# Altium PCB PCB.PcbDoc (part 1 of 2)
Units mm, origin at the board's own origin, x right, y up, seen from the top; angles counter-clockwise.
Board outline 45 x 167.34 mm, 2 copper layers (Top Layer, Bottom Layer); 96 components, 59 nets, 383 pads, 99 vias.
Unrouted connection lines stored in the file: 24.
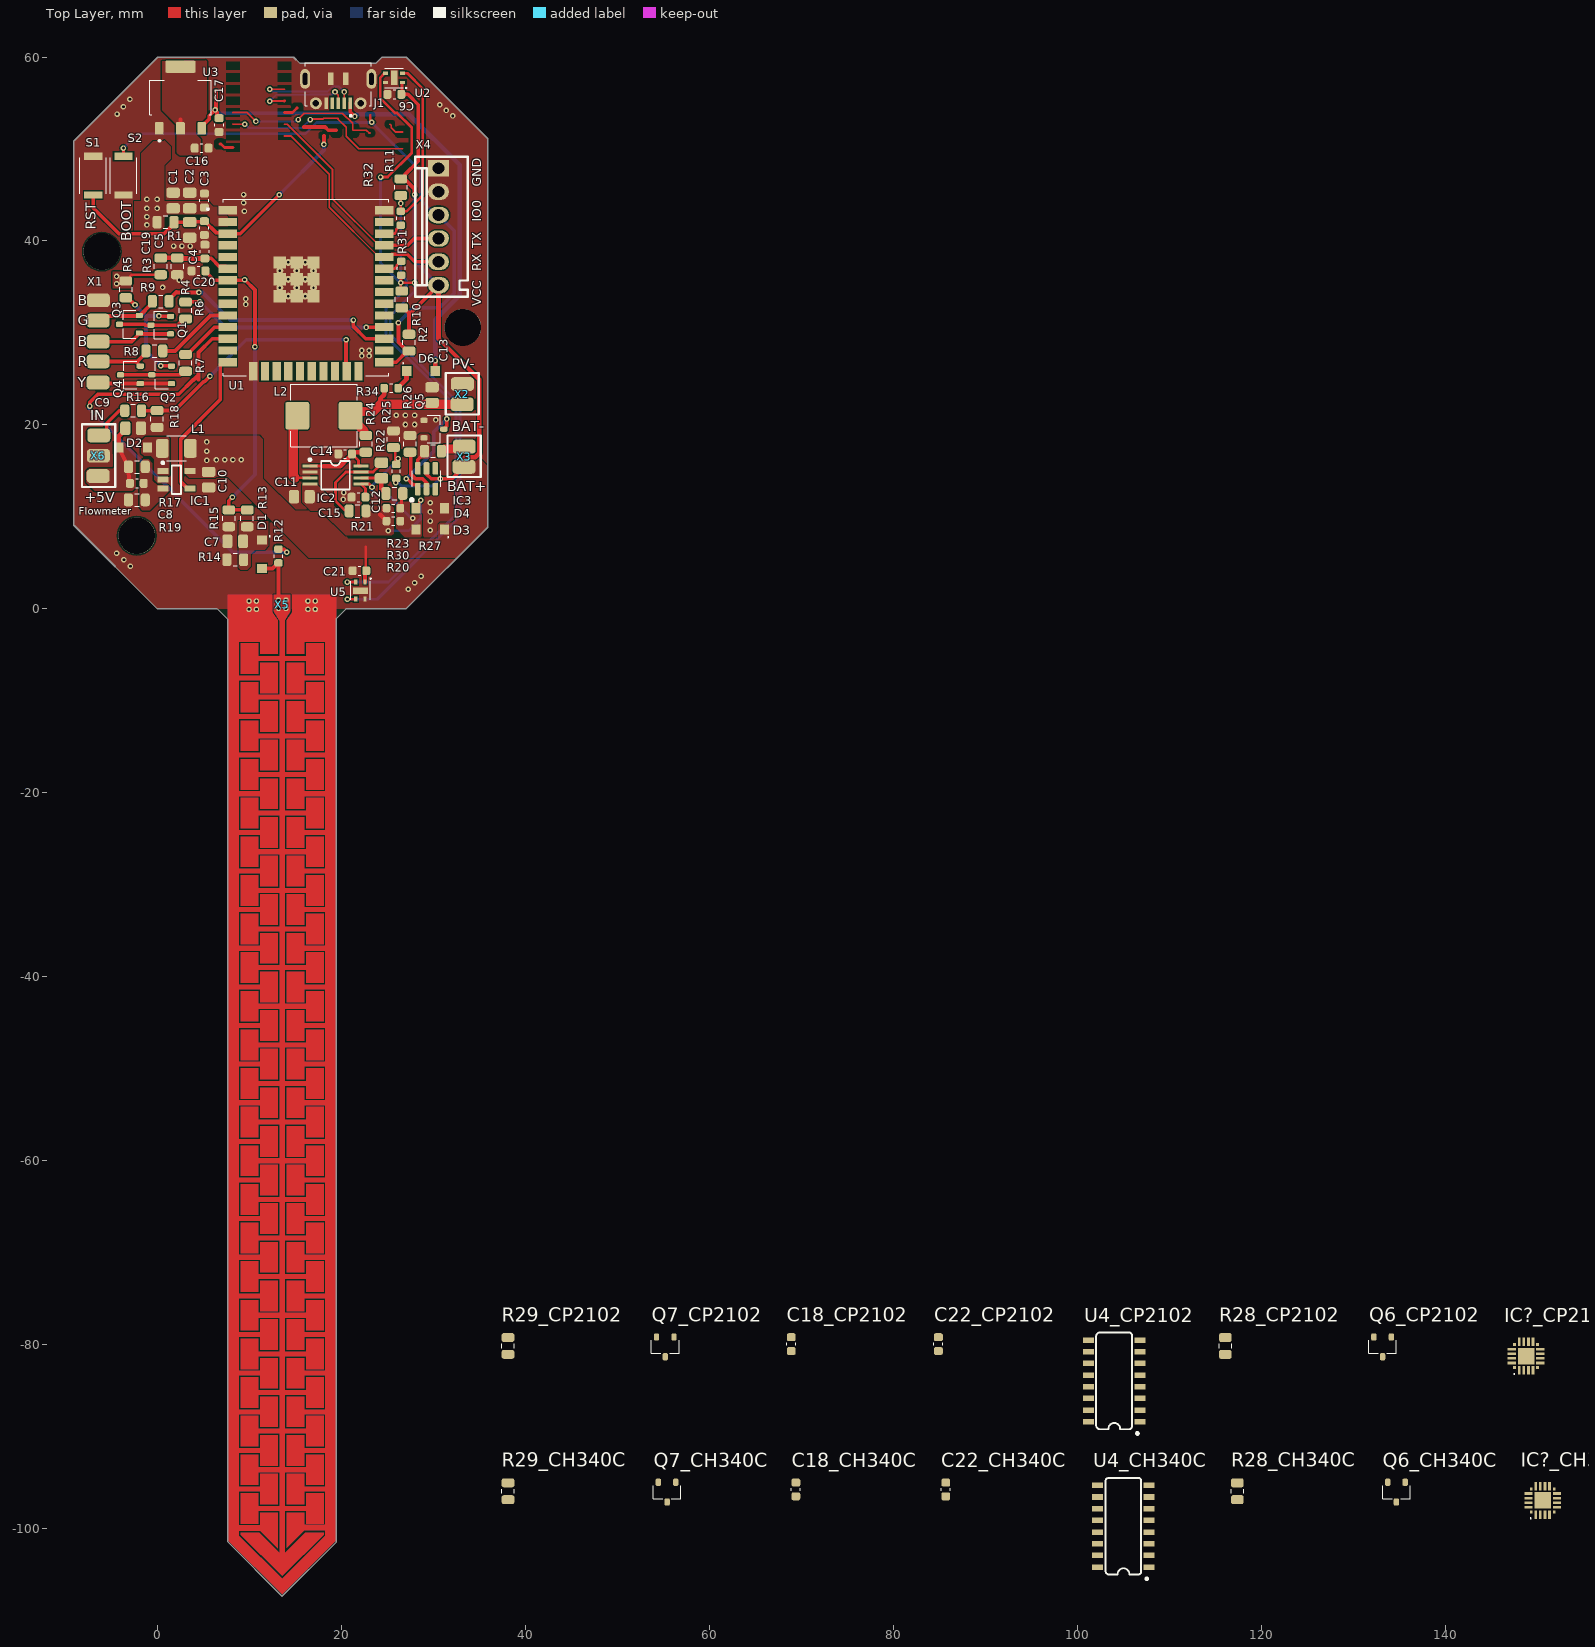
[diagram p0: Top Layer view]
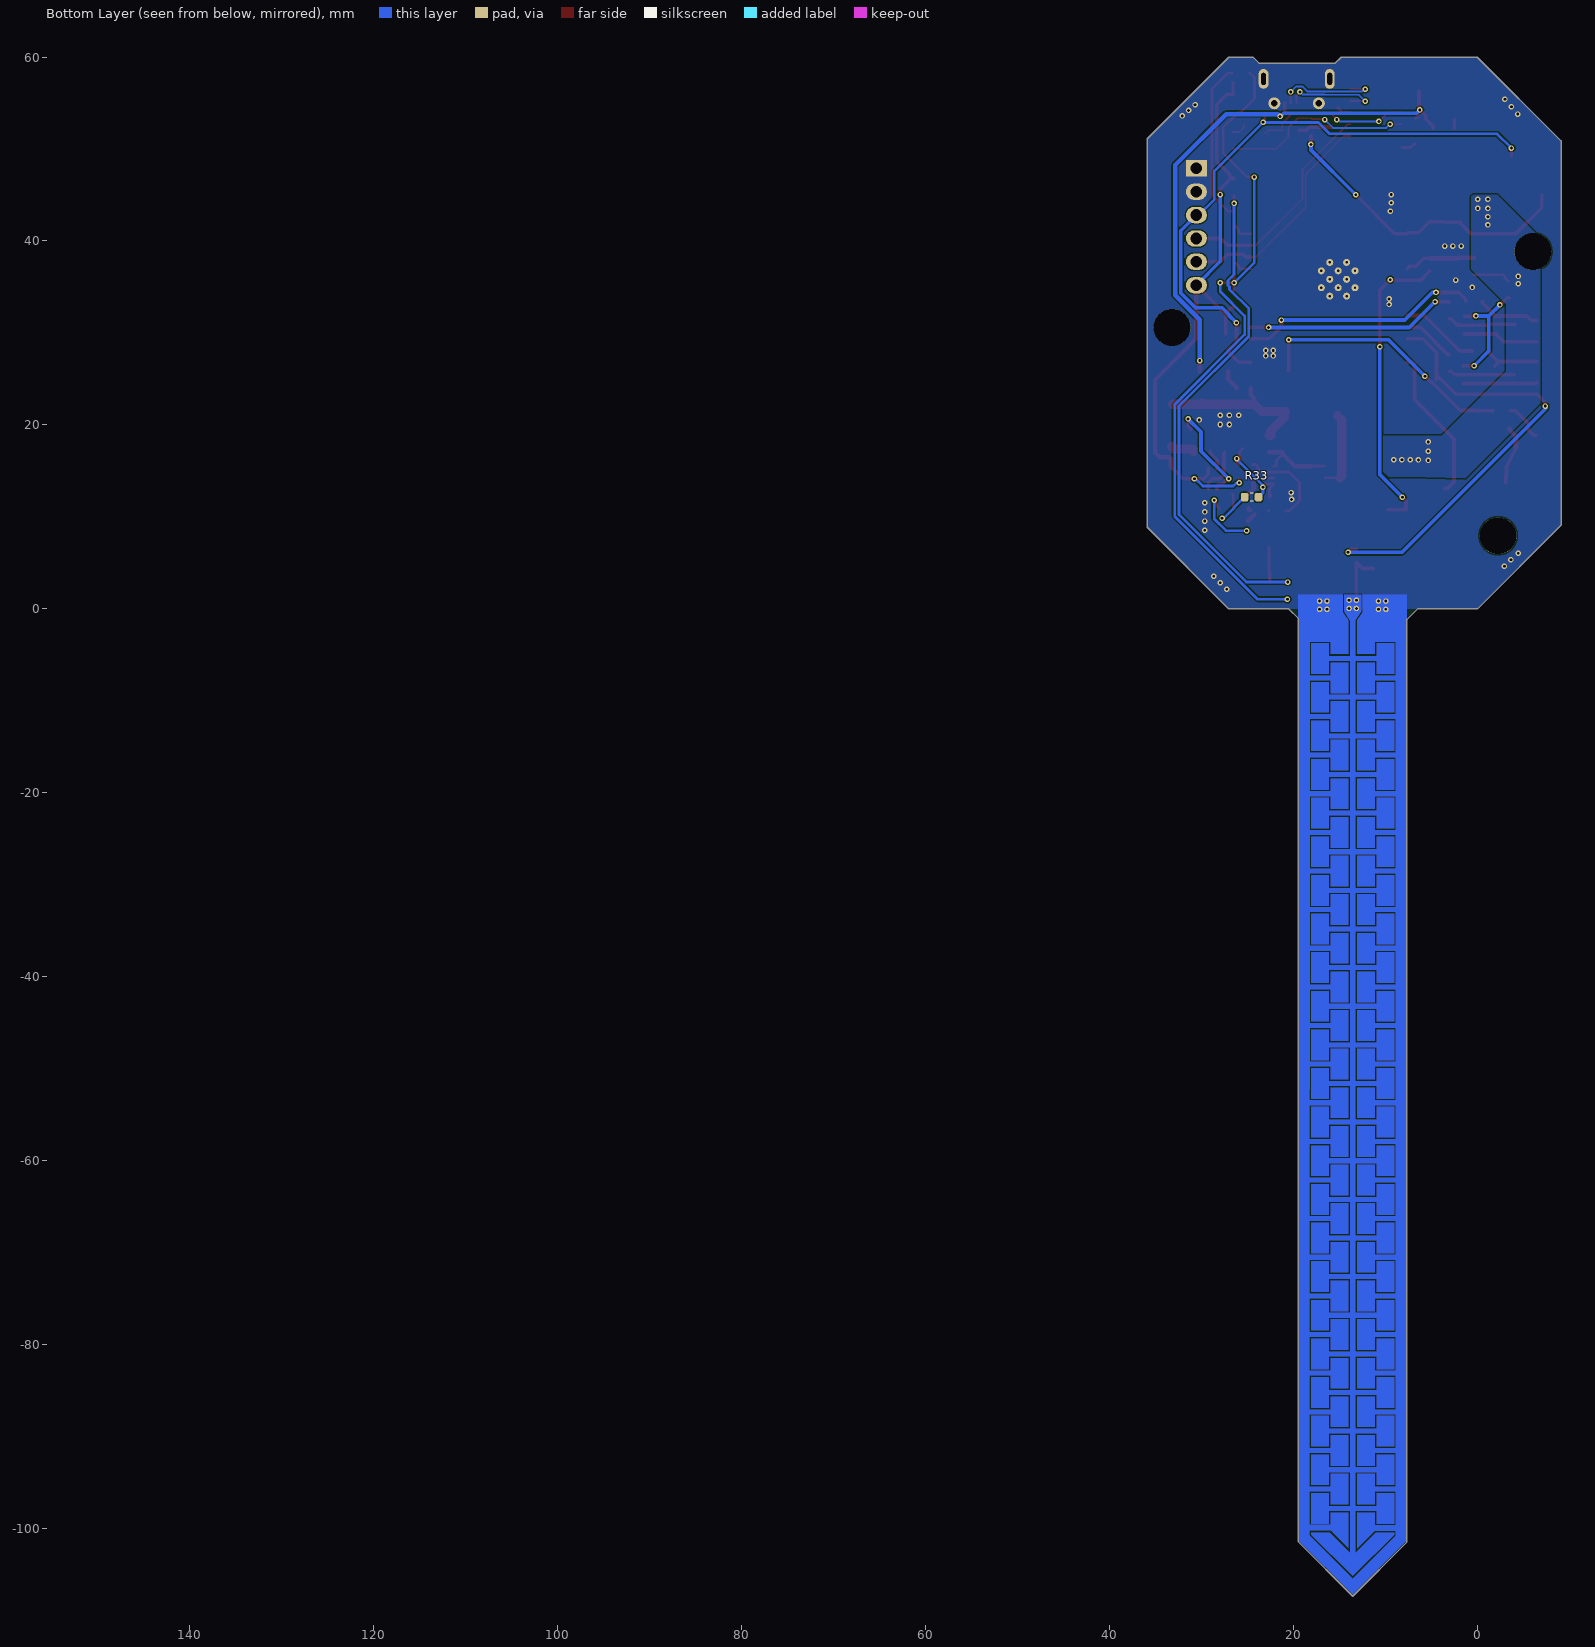
[diagram p1: Bottom Layer view, seen from below]

## Layer stack, top to bottom
Top Solder: solder mask 0.0102, Solder Resist, Dk 3.5
Top Layer: signal copper 0.0356
Dielectric 1: dielectric 0.32, FR-4, Dk 4.8
Bottom Layer: signal copper 0.0356
Bottom Solder: solder mask 0.0102, Solder Resist, Dk 3.5

## Board outline
7.654,-101.455 7.654,-40.855 7.654,-1.145 6.509,0 0,0 -9.096,9.096 -9.096,50.876 0.014,59.986 14.813,59.986 15.454,59.345 23.754,59.345 24.354,59.945 24.395,59.986 27.043,59.986 35.904,51.125 35.904,8.876 27.028,0 20.509,0 19.454,-1.055 19.454,-101.446 13.549,-107.351

## Design rules (kind name [scope] priority, off if disabled: settings)
Clearance [All] p1: gap=0.15 ignorepadtopadclearanceinfootprint=FALSE except(0: Arc-Hole Track-Hole SMDPad-Hole THPad-Hole Via-Hole Fill-Hole Poly-Hole Region-Hole Text-Hole; 0.2: Arc-THPad Arc-Via Track-THPad Track-Via SMDPad-SMDPad SMDPad-THPad; 0.25: SMDPad-Via THPad-Via Via-Via; 0.5: THPad-THPad)
ComponentClearance [All] p1 off: gap=0.254 collisioncheckmode=3 verticalgap=0.254 showdistances=FALSE
HoleSize [All] p1: absolutevalues=TRUE maxlimit=6.3 minlimit=0.2 maxpercent=80.000 minpercent=20.000
MinimumAnnularRing [All] p1: minimumring=0.13
MinimumSolderMaskSliver [All] p1 off: minsoldermaskwidth=0.254
PlaneConnect [All] p1: planeconnectstyle=Direct reliefexpansion=0.508 reliefentries=4 reliefconductorwidth=0.254 reliefairgap=0.254
PolygonConnect [All] p1: connectstyle=Direct reliefconductorwidth=0.254 reliefentries=4 polygonreliefangle="90 Angle" airgapwidth=0.254
RoomDefinition CP2102 [InComponentClass('CP2102')] p1: confinementstyle=ConfineIn formatcopy=TRUE lockcomponents=FALSE outline 37.009,-90.044 161.109,-90.044 161.109,-75.544 37.009,-75.544
RoomDefinition CH340C [InComponentClass('CH340C')] p2: confinementstyle=ConfineIn formatcopy=TRUE lockcomponents=FALSE outline 37.009,-105.844 163.109,-105.844 163.109,-91.344 37.009,-91.344
RoutingVias [All] p1: holewidth=0.3 width=0.6 viastyle="Through Hole" minholewidth=0.2 minwidth=0.45 maxholewidth=6.3 maxwidth=6.7
SilkToSilkClearance [All] p1: silktosilkclearance=0.15
SilkToSolderMaskClearance [IsPad] p1: minsilkscreentomaskgap=0.1 clearancetoexposedcopper=TRUE
SolderMaskExpansion [All] p1: expansion=0.102 istentingtop=FALSE useseparateexpansions=TRUE expansionbottom=0.102 istentingbottom=TRUE
Width [All] p1: maxlimit=2.5 minlimit=0.15 preferedwidth=0.3 minimp=50.000000 maximp=50.000000 favimp=50.000000
24 further rules are at their usual default settings.

## Classes and differential pairs
channel class USBtoSerial: CH340C CP2102
component class CP2102: C18_CP2102 C22_CP2102 IC?_CP2102 Q6_CP2102 Q7_CP2102 R28_CP2102 R29_CP2102 U4_CP2102
component class CH340C: C18_CH340C C22_CH340C IC?_CH340C Q6_CH340C Q7_CH340C R28_CH340C R29_CH340C U4_CH340C

## Components (designator, comment, footprint, x,y, rotation, side; value= is the part's Value field where it differs from the comment)
C1 "22uF" CAPC200X125X110L50N 1.7,44.4 r90 top
C2 "1uF" CAPC200X125X110L50N 3.5,44.4 r90 top
C3 "100nF" CAPC160X80X90L35N 5.1,44.4 r270 top
C4 "22uF" CAPC200X125X110L50N 3.5,41.2 r270 top
C5 "100nF" CAPC160X80X90L35N 5.1,41.4 r90 top
C6 "100n" CAPC160X80X90L35N 25.754,55.945 r180 top
C7 "1uF" CAPC200X125X110L50N 8.454,7.345 r180 top
C8 "3.3pF" CAPC160X80X90L35N -2.246,13.645 r0 top
C9 "1uF" CAPC200X125X110L50N -2.646,19.645 r0 top
C10 "22uF" CAPC200X125X110L50N 5.554,14.045 r270 top
C11 "22uF" CAPC200X125X110L50N 15.7,12.2 r180 top
C12 "1uF" CAPC200X125X110L50N 24.354,15.045 r270 top
C13 "22uF" CAPC200X125X110L50N 29.854,23.245 r90 top
C14 "1nF" CAPC160X80X90L35N 20.404,16.845 r180 top
C15 "1nF" CAPC160X80X90L35N 21.854,12.145 r180 top
C16 "10uF" CAPC160X80X90L35N 4.8,50.1 r0 top
C17 "10uF" CAPC160X80X90L35N 6.7,52.6 r270 top
C18_CH340C "100n" CAPC160X80X90L35N 69.409,-95.744 r90 top (schematic designator C18)
C18_CP2102 "100n" CAPC160X80X90L35N 68.909,-79.944 r90 top (schematic designator C18)
C19 "100nF" CAPC160X80X90L35N 5.154,38.845 r270 top
C20 "100nF" CAPC160X80X90L35N 4.454,36.745 r0 top
C21 "100n" CAPC160X80X90L35N 21.954,4.145 r180 top
C22_CH340C "100n" CAPC160X80X90L35N 85.709,-95.744 r90 top (schematic designator C22)
C22_CP2102 "100n" CAPC160X80X90L35N 84.909,-79.944 r90 top (schematic designator C22)
D1 "B5819W" SODFL350X110-2N 11.354,5.945 r270 top
D2 "B5819W" SODFL350X110-2N -2.646,17.545 r0 top
D3 "B5819W" SODFL350X110-2N 29.654,8.645 r180 top
D4 "B5819W" SODFL350X110-2N 29.654,10.945 r0 top
D6 "B5819W" SODFL350X110-2N 28.654,25.845 r0 top
IC1 "TPS61040" SOT23-5 2.054,14.045 r180 top
IC2 "SPV1040" SPV1040 19.354,14.545 r0 top
IC3 "DW01A" CFP6P95_290X280X145L45X40N 29.254,14.145 r270 top
IC?_CH340C "CP2102N-A02-GQFN20R" CP2102NA02GQFN20 150.609,-96.944 r90 top (schematic designator IC?)
IC?_CP2102 "CP2102N-A02-GQFN20R" CP2102NA02GQFN20 148.809,-81.244 r90 top (schematic designator IC?)
J1 "microUSB" SHOUHAN_MICROXNJ 19.654,56.307 r90 top
L1 "4.7uH" INDM320X250X240L55X190N 2.054,17.445 r180 top
L2 "10uH" INDM730X660X300L160X290N 18.1,21 r180 top
Q1 "SI2301CDS" SOT23-3P95_240X114L20X40N 0.354,30.845 r0 top
Q2 "SI2301CDS" SOT23-3P95_240X114L20X40N 0.454,25.445 r0 top
Q3 "AO3400A" SOT23-3P95_240X114L20X40N -3.046,30.945 r0 top
Q4 "AO3400A" SOT23-3P95_240X114L20X40N -2.946,25.445 r0 top
Q5 "AO3400A" SOT23-3P95_240X114L20X40N 30.054,19.545 r180 top
Q6_CH340C "MMBT5551" SOT23-3P95_240X114L20X40N 134.709,-96.044 r90 top (schematic designator Q6)
Q6_CP2102 "MMBT5551" SOT23-3P95_240X114L20X40N 133.209,-80.244 r90 top (schematic designator Q6)
Q7_CH340C "MMBT5551" SOT23-3P95_240X114L20X40N 55.409,-96.044 r90 top (schematic designator Q7)
Q7_CP2102 "MMBT5551" SOT23-3P95_240X114L20X40N 55.209,-80.244 r90 top (schematic designator Q7)
R1 "10k" RESC200X125X70L40N 0.879,42.045 r0 top
R2 "10k" RESC200X125X70L40N 27.354,28.945 r90 top
R3 "10k" RESC200X125X70L40N 0.354,37.245 r270 top
R4 "10k" RESC200X125X70L40N 2.154,37.245 r90 top
R5 "1R" RESC200X125X70L40N -3.446,34.745 r90 top
R6 "10k" RESC200X125X70L40N 3.054,32.445 r90 top
R7 "10k" RESC200X125X70L40N 3.054,26.745 r90 top
R8 "10k" RESC200X125X70L40N -0.346,28.045 r0 top
R9 "10k" RESC200X125X70L40N 0.354,33.445 r180 top
R10 "4.7k" RESC200X125X70L40N 26.554,33.645 r270 top
R11 "4.7k" RESC200X125X70L40N 26.454,45.845 r90 top
R12 "100k" RESC160X80X90L30N 13.154,5.745 r270 top
R13 "10k" RESC200X125X70L40N 9.754,9.845 r270 top
R14 "10k" RESC200X125X70L40N 8.454,5.345 r0 top
R15 "4.7k" RESC200X125X70L40N 7.754,9.845 r90 top
R16 "10k" RESC200X125X70L40N -2.646,21.545 r180 top
R17 "680k" RESC200X125X70L40N -2.246,15.445 r180 top
R18 "10k" RESC200X125X70L40N -0.046,20.645 r90 top
R19 "200k" RESC200X125X70L40N -2.246,11.845 r0 top
R20 "1" RESC160X80X90L30N 25.654,9.545 r0 top
R21 "1k" RESC200X125X70L40N 21.754,10.645 r0 top
R22 "360k" RESC160X80X90L30N 25.954,14.945 r270 top
R23 "1k" RESC200X125X70L40N 25.754,12.545 r0 top
R24 "1k" RESC200X125X70L40N 22.654,17.945 r270 top
R25 "200k" RESC200X125X70L40N 25.654,18.445 r270 top
R26 "1k" RESC200X125X70L40N 27.454,17.945 r270 top
R27 "0" RESC200X125X70L40N 29.954,17.145 r180 top
R28_CH340C "10k" RESC200X125X70L40N 117.409,-95.944 r90 top (schematic designator R28)
R28_CP2102 "10k" RESC200X125X70L40N 116.109,-80.144 r90 top (schematic designator R28)
R29_CH340C "10k" RESC200X125X70L40N 38.109,-95.944 r90 top (schematic designator R29)
R29_CP2102 "10k" RESC200X125X70L40N 38.109,-80.144 r90 top (schematic designator R29)
R30 "1" RESC160X80X90L30N 25.654,10.945 r0 top
R31 "22" RESC160X80X90L30N 26.498,37.033 r90 top
R32 "22" RESC160X80X90L30N 26.454,42.469 r270 top
R33 "360k" RESC160X80X90L30N 24.554,12.145 r0 bottom
R34 "22" RESC160X80X90L30N 25.4,24 r0 top
S1 "Switch" SKRKAEE020 -7,47.1 r270 top
S2 "Switch" SKRKAEE020 -3.7,47.1 r270 top
U1 "ESP32-WROOM-32U" ESP32-WROOM-32U 16.135,34.58 r270 top
U2 "SHTC3" SHTCx 25.729,57.732 r180 top
U3 "AMS1117" SOT229P700X180-4N 2.5,55.4 r270 top
U4_CH340C "CH340C" SO016 105.009,-99.744 r90 top (schematic designator U4)
U4_CP2102 "CH340C" SO016 104.009,-83.944 r90 top (schematic designator U4)
U5 "SHTC3" SHTCx 22.065,1.99 r270 top
X1 "motor_connector" motor_connector -6.46,29.059 r0 top
X2 "Solar panel" "Solar Panel connenctor" 33.154,23.345 r180 top
X3 "Batery" "Battery connector" 33.354,16.545 r180 top
X4 "program port" A2543WV-6P 30.554,41.545 r90 top
X5 "Soil moisture electrode" "Soil moisture sensor - long" 13.554,0.445 r90 top
X6 "Flowmeter" Flowmeter -6.401,17.755 r180 top

## Footprints (in the part's own frame and the unit in brackets; to place one, negate y for a bottom-side part, rotate by r counter-clockwise, add the part's x,y. Pads: shape width x height; smd on the part's side, far side on the other; paste and mask are expansions set on the pad)
A2543WV-6P [mil] "program port for ESP"
  rect 70x90 hole 50: 1(250,0)
  oval 70x90 hole 50: 2(150,0) 3(50,0) 4(-50,0) 5(-150,0) 6(-250,0)
  silkscreen extent -300,-125 300,100, body extent -300,-50 300,50, height 336
"Battery connector" [mm]
  rrect50% 2.5x1.5 smd: BAT+(0.03,1.107) BAT-(0,-1.1)
  silkscreen extent -1.79,-2.3 1.81,2.2
CAPC160X80X90L35N [mm] "Capacitor, Chip;  0603, 1.60 mm L X 0.80 mm W X 0.90 mm H body"
  rrect51% 0.87x0.97 smd: 1(-0.75,0) 2(0.75,0)
  silkscreen extent -0.14,-0.48 0.14,0.48, body extent -0.8,-0.4 0.8,0.4, height 0.9
CAPC200X125X110L50N [mm] "Capacitor, Chip; 0805; 2.00 mm L X 1.25 mm W X 1.10 mm H body"
  rrect45% 1.11x1.47 smd: 1(-0.85,0) 2(0.85,0)
  body extent -1,-0.62 1,0.63, height 1.1
CFP6P95_290X280X145L45X40N [mm] "Ceramic Flat Pack (CFP), SOT23-6, 0.95 mm pitch; 6 pin, 2.90 mm L X 1.60 mm W X 1.45 mm H body"
  rrect51% 1.37x0.63 smd: 1(1.125,-0.95) 2(1.125,0) 3(1.125,0.95) 4(-1.125,0.95) 5(-1.125,0) 6(-1.125,-0.95)
  silkscreen extent -0.88,-1.53 0.88,1.53, body extent -1.42,-1.46 1.42,1.46, height 1.1
CP2102NA02GQFN20 [mm]
  rect 0.3x0.3 smd: 1(-1.25,1.25) 6(-1.25,-1.25) 11(1.25,-1.25) 16(1.25,1.25)
  rect 0.9x0.3 smd: 2(-1.55,0.75) 3(-1.55,0.25) 4(-1.55,-0.25) 5(-1.55,-0.75) 12(1.55,-0.75) 13(1.55,-0.25) 14(1.55,0.25) 15(1.55,0.75)
  rect 0.3x0.9 smd: 7(-0.75,-1.55) 8(-0.25,-1.55) 9(0.25,-1.55) 10(0.75,-1.55) 17(0.75,1.55) 18(0.25,1.55) 19(-0.25,1.55) 20(-0.75,1.55)
  rect 1.8x1.8 smd: 21(0,0)
  silkscreen extent -2,1.25 -1.9,1.35, body extent -1.5,-1.5 1.5,1.5, height 0.75
ESP32-WROOM-32U [mm]
  rect 0.9x2 smd: 1(-8.755,-8.5) 2(-7.485,-8.5) 3(-6.215,-8.5) 4(-4.945,-8.5) 5(-3.675,-8.5) 6(-2.405,-8.5) 7(-1.135,-8.5) 8(0.135,-8.5) 9(1.405,-8.5) 10(2.675,-8.5) 11(3.945,-8.5) 12(5.215,-8.5) 13(6.485,-8.5) 14(7.755,-8.5) 25(7.755,8.5) 26(6.485,8.5) 27(5.215,8.5) 28(3.945,8.5) 29(2.675,8.5) 30(1.405,8.5) 31(0.135,8.5) 32(-1.135,8.5) 33(-2.405,8.5) 34(-3.675,8.5) 35(-4.945,8.5) 36(-6.215,8.5) 37(-7.485,8.5) 38(-8.755,8.5)
  rect 2x0.9 smd: 15(8.755,-5.715) 16(8.755,-4.445) 17(8.755,-3.175) 18(8.755,-1.905) 19(8.755,-0.635) 20(8.755,0.635) 21(8.755,1.905) 22(8.755,3.175) 23(8.755,4.445) 24(8.755,5.715)
  rect 1.33x1.33 smd: G.1(-3.09,0.835) G.2(-3.09,-1) G.4(-3.09,-2.835) G.5(-1.255,0.835) G.6(-1.255,-1) G.7(-1.255,-2.835) G.8(0.58,0.835) G.9(0.58,-1) G.10(0.58,-2.835)
  round 0.762 hole 0.254: G.11(-3.09,-0.082) G.12(-3.09,-1.917) G.13(-2.172,0.835) G.14(-2.172,-1) G.15(-2.172,-2.835) G.16(-1.255,-0.082) G.17(-1.255,-1.917) G.18(-0.337,0.835) G.19(-0.337,-1) G.20(-0.337,-2.835) G.21(0.58,-0.082) G.22(0.58,-1.917)
  silkscreen extent -9.94,-10.75 9.26,9, body extent -9.94,-9 9.25,9, height 3.3
Flowmeter [mm]
  rrect50% 2.5x1.5 smd: +5V(0.045,3.311) GND(0.015,1.104) Out(-0.015,-1.104)
  silkscreen extent -1.8,-2.3 1.8,4.5
INDM320X250X240L55X190N [mm] "Inductor, Molded Body; 2.10 mm L X 2.50 mm W X 2.40 mm H body"
  rrect36% 1.37x2.03 smd: 1(-1.525,0) 2(1.525,0)
  silkscreen extent -1.05,-1.35 1.05,1.35, body extent -1.6,-1.25 1.6,1.25, height 2.4
INDM730X660X300L160X290N [mm] "Inductor, Molded Body; 7.20 mm L X 6.60 mm W X 3.00 mm H body"
  rrect19% 2.61x3.01 smd: 1(-2.9,0) 2(2.9,0)
  silkscreen extent -3.6,-3.4 3.6,3.4, body extent -3.65,-3.3 3.65,3.3, height 3
motor_connector [mm]
  rrect50% 2.5x1.5 smd: "1 - Black"(0.03,4.493) "2 - Green"(0,2.286) "3 - Blue"(0,0) "4 - Red"(0,-2.159) "5 - Yellow"(0,-4.445)
RESC160X80X90L30N [mm] "Resistor, Chip; 0603; 1.60 mm L X 0.80 mm W X 0.90 mm H body"
  rrect51% 0.82x0.93 smd: 1(-0.755,0) 2(0.755,0)
  silkscreen extent -0.17,-0.45 0.17,0.45, body extent -0.8,-0.4 0.8,0.4, height 0.9
RESC200X125X70L40N [mm] "Resistor, Chip; 0805; 2.00 mm L X 1.25 mm W X 0.70 mm H body"
  rrect51% 0.99x1.38 smd: 1(-0.915,0) 2(0.915,0)
  silkscreen extent -0.24,-0.68 0.24,0.68, body extent -1,-0.62 1,0.63, height 0.7
SHOUHAN_MICROXNJ [mm]
  rect 1.25x0.4 smd: 1(-1.312,-1.3) 2(-1.312,-0.65) 3(-1.312,0) 4(-1.312,0.65) 5(-1.312,1.3)
  rect 1.35x0.6 smd: S1(1.338,0.8) S2(1.338,-0.8)
  oval 2.14x1.07 hole 0.5 slot 1.3 at 0 deg: S3(1.313,3.6) S6(1.313,-3.6)
  round 1.3 hole 0.7: S4(-1.337,2.425) S5(-1.337,-2.425)
  silkscreen extent -2.79,-3.6 3.06,3.6, body extent -1.84,-4.02 3.96,4.03, height 2.71
SHTCx [mm] "SENSOR HUMI/TEMP 1.62V-3.6V I2C 2% SMD"
  rect 0.55x0.35 smd paste-0.5 mask+0.05: 1(-0.925,0.5) 2(-0.925,-0.5)
  rect 0.55x0.35 smd paste-0.6 mask+0.05: 3(0.925,-0.5)
  rect 0.55x0.35 smd paste-0.2 mask+0.05: 4(0.925,0.5)
  rect 0.7x1.6 smd paste-0.1 mask+0.05: 5(0,0)
  rect 0.45x0.35 on Top Paste paste-0.6 mask+0.05: ""(-0.875,-0.5) ""(-0.875,0.5) ""(0.875,-0.5) ""(0.875,0.5)
  silkscreen extent -1.33,-1.07 1,1.13, body extent -1,-1 1,1, height 0.75
SKRKAEE020 [mm]
  rect 0.8x2 smd: 1(-2.1,0) 2(2.1,0)
  silkscreen extent -1.95,-1.45 1.95,1.45, body extent -2.4,-1.45 2.4,1.45, height 1.9
SO016 [mm]
  rect 0.6x1.2 smd: 1(-4.445,-2.8) 2(-3.175,-2.8) 3(-1.905,-2.8) 4(-0.635,-2.8) 5(0.635,-2.8) 6(1.905,-2.8) 7(3.175,-2.8) 8(4.445,-2.8) 9(4.445,2.8) 10(3.175,2.8) 11(1.905,2.8) 12(0.635,2.8) 13(-0.635,2.8) 14(-1.905,2.8) 15(-3.175,2.8) 16(-4.445,2.8)
  silkscreen extent -5.84,-2.67 5.26,1.95
SODFL350X110-2N [mm] "SODFL, 2-Leads, Body 1.70x3.50mm, IPC Medium Density"
  rect 1x1.1 smd: A(1.55,0) C(-1.55,0)
  silkscreen extent -2,0.8 -1.9,0.9, body extent -1.75,-0.95 1.75,0.95, height 1.1
"Soil moisture sensor - long" [mm]
  round 0.6 hole 0.3: 1(-0.5,2.8) 1(-0.5,3.6) 1(-0.5,-3.6) 1(-0.5,-2.8) 1(0.4,3.6) 1(0.4,2.8) 1(0.4,-3.6) 1(0.4,-2.8) 2(-0.4,0.4) 2(-0.4,-0.4) 2(0.5,-0.4) 2(0.5,0.4)
  Top Layer region: -103.8,-0.3 -1.5,-0.3 -1.5,0.3 -103.8,0.3
  Top Layer region: -18.2,-2.6 -16.8,-2.6 -16.8,-4.5 -20.1,-4.5 -20.1,-2.6 -18.7,-2.6 -18.7,0 -18.2,0
  Top Layer region: -9.8,2.6 -8.4,2.6 -8.4,4.5 -11.7,4.5 -11.7,2.6 -10.3,2.6 -10.3,0 -9.8,0
  Top Layer region: -30.8,2.6 -29.4,2.6 -29.4,4.5 -32.7,4.5 -32.7,2.6 -31.3,2.6 -31.3,0 -30.8,0
  Top Layer region: -39.2,2.6 -37.8,2.6 -37.8,4.5 -41.1,4.5 -41.1,2.6 -39.7,2.6 -39.7,0 -39.2,0
  Top Layer region: -14,2.6 -12.6,2.6 -12.6,4.5 -15.9,4.5 -15.9,2.6 -14.5,2.6 -14.5,0 -14,0
  Top Layer region: -1.7,0.2
  Top Layer region: -105.6,0 -101.1,-4.5 -100.9,-4.5 -100.9,-2.5 -103.4,0
  Top Layer region: -1.7,0.3 -0.7,0.9 -0.7,-0.9 -1.7,-0.3
  Top Layer region: -39.2,-2.6 -37.8,-2.6 -37.8,-4.5 -41.1,-4.5 -41.1,-2.6 -39.7,-2.6 -39.7,0 -39.2,0
  Top Layer region: -18.2,2.6 -16.8,2.6 -16.8,4.5 -20.1,4.5 -20.1,2.6 -18.7,2.6 -18.7,0 -18.2,0
  Top Layer region: -22.4,-2.6 -21,-2.6 -21,-4.5 -24.3,-4.5 -24.3,-2.6 -22.9,-2.6 -22.9,0 -22.4,0
  Top Layer region: -6.1,-2.6 -7.5,-2.6 -7.5,-4.5 -4.2,-4.5 -4.2,-2.6 -5.6,-2.6 -5.6,0 -6.1,0
  Top Layer region: -5.6,2.6 -4.2,2.6 -4.2,4.5 -7.5,4.5 -7.5,2.6 -6.1,2.6 -6.1,0 -5.6,0
  Top Layer region: -0.7,-0.9 1.1,-0.9 1.1,0.9 -0.7,0.9
  Top Layer region: -26.6,-2.6 -25.2,-2.6 -25.2,-4.5 -28.5,-4.5 -28.5,-2.6 -27.1,-2.6 -27.1,0 -26.6,0
  Top Layer region: -9.8,-2.6 -8.4,-2.6 -8.4,-4.5 -11.7,-4.5 -11.7,-2.6 -10.3,-2.6 -10.3,0 -9.8,0
  Top Layer region: -42.1,4.5
  Top Layer region: -26.6,2.6 -25.2,2.6 -25.2,4.5 -28.5,4.5 -28.5,2.6 -27.1,2.6 -27.1,0 -26.6,0
  Top Layer region: -30.8,-2.6 -29.4,-2.6 -29.4,-4.5 -32.7,-4.5 -32.7,-2.6 -31.3,-2.6 -31.3,0 -30.8,0
  Top Layer region: -35,2.6 -33.6,2.6 -33.6,4.5 -36.9,4.5 -36.9,2.6 -35.5,2.6 -35.5,0 -35,0
  Top Layer region: -14,-2.6 -12.6,-2.6 -12.6,-4.5 -15.9,-4.5 -15.9,-2.6 -14.5,-2.6 -14.5,0 -14,0
  Top Layer region: -35,-2.6 -33.6,-2.6 -33.6,-4.5 -36.9,-4.5 -36.9,-2.6 -35.5,-2.6 -35.5,0 -35,0
  Top Layer region: -22.4,2.6 -21,2.6 -21,4.5 -24.3,4.5 -24.3,2.6 -22.9,2.6 -22.9,0 -22.4,0
  Top Layer region: -0.7,1.3
  Top Layer region: -1.7,-5.9 1.1,-5.9 1.1,-4.1 1.1,-1.1 -0.8,-1.1 -1.7,-0.5
  Top Layer region: -1.7,0.5 -0.8,1.1 1.1,1.1 1.1,4.1 -1.037,4.1 1.1,4.1 1.1,5.9 -1.7,5.9
  Top Layer region: -1.7,5.9
  Top Layer region: -1.7,5.9
  Top Layer region: -46.9,0
  Top Layer region: -46.9,0
  Top Layer region: -42,4.5
  Top Layer region: -100.65,-4.9 -100.65,-2.4 -102.55,-0.5 -98.7,-0.5 -98.7,-2.4 -100.05,-2.4 -100.05,-4.9
  Top Layer region: -101.7,-5.9 -107.6,0 -105.9,0 -101.2,-4.7 -101.2,-5.9
  Top Layer region: -42.9,-5.9
  Top Layer region: -101.7,5.9 -107.6,0 -105.9,0 -101.2,4.7 -101.2,5.9
  Top Layer region: -100.7,4.9 -100.7,2.4 -102.6,0.5 -98.7,0.5 -98.7,2.4 -100.1,2.4 -100.1,4.9
  Top Layer region: -42.9,5.9
  Top Layer region: -37.6,-2.4 -39,-2.4 -39,-0.5 -35.7,-0.5 -35.7,-2.4 -37.1,-2.4 -37.1,-5 -37.6,-5
  Top Layer region: -33.4,-2.4 -34.8,-2.4 -34.8,-0.5 -31.5,-0.5 -31.5,-2.4 -32.9,-2.4 -32.9,-5 -33.4,-5
  Top Layer region: -29.2,-2.4 -30.6,-2.4 -30.6,-0.5 -27.3,-0.5 -27.3,-2.4 -28.7,-2.4 -28.7,-5 -29.2,-5
  Top Layer region: -25,-2.4 -26.4,-2.4 -26.4,-0.5 -23.1,-0.5 -23.1,-2.4 -24.5,-2.4 -24.5,-5 -25,-5
  Top Layer region: -20.8,-2.4 -22.2,-2.4 -22.2,-0.5 -18.9,-0.5 -18.9,-2.4 -20.3,-2.4 -20.3,-5 -20.8,-5
  Top Layer region: -16.6,-2.4 -18,-2.4 -18,-0.5 -14.7,-0.5 -14.7,-2.4 -16.1,-2.4 -16.1,-5 -16.6,-5
  Top Layer region: -12.4,-2.4 -13.8,-2.4 -13.8,-0.5 -10.5,-0.5 -10.5,-2.4 -11.9,-2.4 -11.9,-5 -12.4,-5
  Top Layer region: -8.2,-2.4 -9.6,-2.4 -9.6,-0.5 -6.3,-0.5 -6.3,-2.4 -7.7,-2.4 -7.7,-5 -8.2,-5
  Top Layer region: -37.6,2.4 -39,2.4 -39,0.5 -35.7,0.5 -35.7,2.4 -37.1,2.4 -37.1,5 -37.6,5
  Top Layer region: -33.4,2.4 -34.8,2.4 -34.8,0.5 -31.5,0.5 -31.5,2.4 -32.9,2.4 -32.9,5 -33.4,5
  Top Layer region: -29.2,2.4 -30.6,2.4 -30.6,0.5 -27.3,0.5 -27.3,2.4 -28.7,2.4 -28.7,5 -29.2,5
  Top Layer region: -25,2.4 -26.4,2.4 -26.4,0.5 -23.1,0.5 -23.1,2.4 -24.5,2.4 -24.5,5 -25,5
  Top Layer region: -20.8,2.4 -22.2,2.4 -22.2,0.5 -18.9,0.5 -18.9,2.4 -20.3,2.4 -20.3,5 -20.8,5
  Top Layer region: -16.6,2.4 -18,2.4 -18,0.5 -14.7,0.5 -14.7,2.4 -16.1,2.4 -16.1,5 -16.6,5
  Top Layer region: -12.4,2.4 -13.8,2.4 -13.8,0.5 -10.5,0.5 -10.5,2.4 -11.9,2.4 -11.9,5 -12.4,5
  Top Layer region: -8.2,2.4 -9.6,2.4 -9.6,0.5 -6.3,0.5 -6.3,2.4 -7.7,2.4 -7.7,5 -8.2,5
  Top Layer region: -1.7,-0.5 -5.3,-0.5 -5.3,-2.4 -4,-2.4 -4,-4.7 -101.6,-4.7 -101.6,-5.9 -1.7,-5.9
  Top Layer region: 0,2
  Top Layer region: -1.7,0.5 -5.3,0.5 -5.3,2.4 -4,2.4 -4,4.7 -101.5,4.7 -101.5,5.9 -1.7,5.9
  Top Layer region: -33.4,2.4 -34.8,2.4 -34.8,0.5 -31.5,0.5 -31.5,2.4 -32.9,2.4 -32.9,5 -33.4,5
  Top Layer region: -105.6,0 -101.1,4.5 -100.9,4.5 -100.9,2.5 -103.4,0
  Top Layer region: 0,2
  Top Layer region: -1.7,5.9
  Top Layer region: -1.7,5.9
  Top Layer region: -0.7,1.3
  Top Layer region: -1.7,0.2
  Top Layer region: -42.9,5.9
  Top Layer region: -42,4.5
  Top Layer region: -42.1,4.5
  Top Layer region: -42.9,-5.9
  Top Layer region: -46.9,0
  Top Layer region: -46.9,0
  Top Layer region: -43.4,2.6 -42,2.6 -42,4.5 -45.3,4.5 -45.3,2.6 -43.9,2.6 -43.9,0 -43.4,0
  Top Layer region: -64.4,2.6 -63,2.6 -63,4.5 -66.3,4.5 -66.3,2.6 -64.9,2.6 -64.9,0 -64.4,0
  Top Layer region: -72.8,2.6 -71.4,2.6 -71.4,4.5 -74.7,4.5 -74.7,2.6 -73.3,2.6 -73.3,0 -72.8,0
  Top Layer region: -47.6,2.6 -46.2,2.6 -46.2,4.5 -49.5,4.5 -49.5,2.6 -48.1,2.6 -48.1,0 -47.6,0
  Top Layer region: -51.8,2.6 -50.4,2.6 -50.4,4.5 -53.7,4.5 -53.7,2.6 -52.3,2.6 -52.3,0 -51.8,0
  Top Layer region: -60.2,2.6 -58.8,2.6 -58.8,4.5 -62.1,4.5 -62.1,2.6 -60.7,2.6 -60.7,0 -60.2,0
  Top Layer region: -68.6,2.6 -67.2,2.6 -67.2,4.5 -70.5,4.5 -70.5,2.6 -69.1,2.6 -69.1,0 -68.6,0
  Top Layer region: -56,2.6 -54.6,2.6 -54.6,4.5 -57.9,4.5 -57.9,2.6 -56.5,2.6 -56.5,0 -56,0
  Top Layer region: -71.2,2.4 -72.6,2.4 -72.6,0.5 -69.3,0.5 -69.3,2.4 -70.7,2.4 -70.7,5 -71.2,5
  Top Layer region: -62.8,2.4 -64.2,2.4 -64.2,0.5 -60.9,0.5 -60.9,2.4 -62.3,2.4 -62.3,5 -62.8,5
  Top Layer region: -58.6,2.4 -60,2.4 -60,0.5 -56.7,0.5 -56.7,2.4 -58.1,2.4 -58.1,5 -58.6,5
  Top Layer region: -54.4,2.4 -55.8,2.4 -55.8,0.5 -52.5,0.5 -52.5,2.4 -53.9,2.4 -53.9,5 -54.4,5
  Top Layer region: -50.2,2.4 -51.6,2.4 -51.6,0.5 -48.3,0.5 -48.3,2.4 -49.7,2.4 -49.7,5 -50.2,5
  Top Layer region: -46,2.4 -47.4,2.4 -47.4,0.5 -44.1,0.5 -44.1,2.4 -45.5,2.4 -45.5,5 -46,5
  Top Layer region: -41.8,2.4 -43.2,2.4 -43.2,0.5 -39.9,0.5 -39.9,2.4 -41.3,2.4 -41.3,5 -41.8,5
  Top Layer region: -67,2.4 -68.4,2.4 -68.4,0.5 -65.1,0.5 -65.1,2.4 -66.5,2.4 -66.5,5 -67,5
  Top Layer region: -77,2.6 -75.6,2.6 -75.6,4.5 -78.9,4.5 -78.9,2.6 -77.5,2.6 -77.5,0 -77,0
  Top Layer region: -98,2.6 -96.6,2.6 -96.6,4.5 -99.9,4.5 -99.9,2.6 -98.5,2.6 -98.5,0 -98,0
  Top Layer region: -81.2,2.6 -79.8,2.6 -79.8,4.5 -83.1,4.5 -83.1,2.6 -81.7,2.6 -81.7,0 -81.2,0
  Top Layer region: -85.4,2.6 -84,2.6 -84,4.5 -87.3,4.5 -87.3,2.6 -85.9,2.6 -85.9,0 -85.4,0
  Top Layer region: -93.8,2.6 -92.4,2.6 -92.4,4.5 -95.7,4.5 -95.7,2.6 -94.3,2.6 -94.3,0 -93.8,0
  Top Layer region: -89.6,2.6 -88.2,2.6 -88.2,4.5 -91.5,4.5 -91.5,2.6 -90.1,2.6 -90.1,0 -89.6,0
  Top Layer region: -96.4,2.4 -97.8,2.4 -97.8,0.5 -94.5,0.5 -94.5,2.4 -95.9,2.4 -95.9,5 -96.4,5
  Top Layer region: -92.2,2.4 -93.6,2.4 -93.6,0.5 -90.3,0.5 -90.3,2.4 -91.7,2.4 -91.7,5 -92.2,5
  Top Layer region: -88,2.4 -89.4,2.4 -89.4,0.5 -86.1,0.5 -86.1,2.4 -87.5,2.4 -87.5,5 -88,5
  Top Layer region: -83.8,2.4 -85.2,2.4 -85.2,0.5 -81.9,0.5 -81.9,2.4 -83.3,2.4 -83.3,5 -83.8,5
  Top Layer region: -79.6,2.4 -81,2.4 -81,0.5 -77.7,0.5 -77.7,2.4 -79.1,2.4 -79.1,5 -79.6,5
  Top Layer region: -75.4,2.4 -76.8,2.4 -76.8,0.5 -73.5,0.5 -73.5,2.4 -74.9,2.4 -74.9,5 -75.4,5
  Top Layer region: -51.8,-2.6 -50.4,-2.6 -50.4,-4.5 -53.7,-4.5 -53.7,-2.6 -52.3,-2.6 -52.3,0 -51.8,0
  Top Layer region: -72.8,-2.6 -71.4,-2.6 -71.4,-4.5 -74.7,-4.5 -74.7,-2.6 -73.3,-2.6 -73.3,0 -72.8,0
  Top Layer region: -56,-2.6 -54.6,-2.6 -54.6,-4.5 -57.9,-4.5 -57.9,-2.6 -56.5,-2.6 -56.5,0 -56,0
  Top Layer region: -60.2,-2.6 -58.8,-2.6 -58.8,-4.5 -62.1,-4.5 -62.1,-2.6 -60.7,-2.6 -60.7,0 -60.2,0
  Top Layer region: -43.4,-2.6 -42,-2.6 -42,-4.5 -45.3,-4.5 -45.3,-2.6 -43.9,-2.6 -43.9,0 -43.4,0
  Top Layer region: -64.4,-2.6 -63,-2.6 -63,-4.5 -66.3,-4.5 -66.3,-2.6 -64.9,-2.6 -64.9,0 -64.4,0
  Top Layer region: -47.6,-2.6 -46.2,-2.6 -46.2,-4.5 -49.5,-4.5 -49.5,-2.6 -48.1,-2.6 -48.1,0 -47.6,0
  Top Layer region: -68.6,-2.6 -67.2,-2.6 -67.2,-4.5 -70.5,-4.5 -70.5,-2.6 -69.1,-2.6 -69.1,0 -68.6,0
  Top Layer region: -71.2,-2.4 -72.6,-2.4 -72.6,-0.5 -69.3,-0.5 -69.3,-2.4 -70.7,-2.4 -70.7,-5 -71.2,-5
  Top Layer region: -67,-2.4 -68.4,-2.4 -68.4,-0.5 -65.1,-0.5 -65.1,-2.4 -66.5,-2.4 -66.5,-5 -67,-5
  Top Layer region: -62.8,-2.4 -64.2,-2.4 -64.2,-0.5 -60.9,-0.5 -60.9,-2.4 -62.3,-2.4 -62.3,-5 -62.8,-5
  Top Layer region: -58.6,-2.4 -60,-2.4 -60,-0.5 -56.7,-0.5 -56.7,-2.4 -58.1,-2.4 -58.1,-5 -58.6,-5
  Top Layer region: -54.4,-2.4 -55.8,-2.4 -55.8,-0.5 -52.5,-0.5 -52.5,-2.4 -53.9,-2.4 -53.9,-5 -54.4,-5
  Top Layer region: -50.2,-2.4 -51.6,-2.4 -51.6,-0.5 -48.3,-0.5 -48.3,-2.4 -49.7,-2.4 -49.7,-5 -50.2,-5
  Top Layer region: -46,-2.4 -47.4,-2.4 -47.4,-0.5 -44.1,-0.5 -44.1,-2.4 -45.5,-2.4 -45.5,-5 -46,-5
  Top Layer region: -41.8,-2.4 -43.2,-2.4 -43.2,-0.5 -39.9,-0.5 -39.9,-2.4 -41.3,-2.4 -41.3,-5 -41.8,-5
  Top Layer region: -85.4,-2.6 -84,-2.6 -84,-4.5 -87.3,-4.5 -87.3,-2.6 -85.9,-2.6 -85.9,0 -85.4,0
  Top Layer region: -89.6,-2.6 -88.2,-2.6 -88.2,-4.5 -91.5,-4.5 -91.5,-2.6 -90.1,-2.6 -90.1,0 -89.6,0
  Top Layer region: -93.8,-2.6 -92.4,-2.6 -92.4,-4.5 -95.7,-4.5 -95.7,-2.6 -94.3,-2.6 -94.3,0 -93.8,0
  Top Layer region: -77,-2.6 -75.6,-2.6 -75.6,-4.5 -78.9,-4.5 -78.9,-2.6 -77.5,-2.6 -77.5,0 -77,0
  Top Layer region: -98,-2.6 -96.6,-2.6 -96.6,-4.5 -99.9,-4.5 -99.9,-2.6 -98.5,-2.6 -98.5,0 -98,0
  Top Layer region: -81.2,-2.6 -79.8,-2.6 -79.8,-4.5 -83.1,-4.5 -83.1,-2.6 -81.7,-2.6 -81.7,0 -81.2,0
  Top Layer region: -96.4,-2.4 -97.8,-2.4 -97.8,-0.5 -94.5,-0.5 -94.5,-2.4 -95.9,-2.4 -95.9,-5 -96.4,-5
  Top Layer region: -92.2,-2.4 -93.6,-2.4 -93.6,-0.5 -90.3,-0.5 -90.3,-2.4 -91.7,-2.4 -91.7,-5 -92.2,-5
  Top Layer region: -88,-2.4 -89.4,-2.4 -89.4,-0.5 -86.1,-0.5 -86.1,-2.4 -87.5,-2.4 -87.5,-5 -88,-5
  Top Layer region: -83.8,-2.4 -85.2,-2.4 -85.2,-0.5 -81.9,-0.5 -81.9,-2.4 -83.3,-2.4 -83.3,-5 -83.8,-5
  Top Layer region: -79.6,-2.4 -81,-2.4 -81,-0.5 -77.7,-0.5 -77.7,-2.4 -79.1,-2.4 -79.1,-5 -79.6,-5
  Top Layer region: -75.4,-2.4 -76.8,-2.4 -76.8,-0.5 -73.5,-0.5 -73.5,-2.4 -74.9,-2.4 -74.9,-5 -75.4,-5
  Bottom Layer region: -103.8,-0.3 -1.5,-0.3 -1.5,0.3 -103.8,0.3
  Bottom Layer region: -98,2.6 -96.6,2.6 -96.6,4.5 -99.9,4.5 -99.9,2.6 -98.5,2.6 -98.5,0 -98,0
  Bottom Layer region: -96.4,2.4 -97.8,2.4 -97.8,0.5 -94.5,0.5 -94.5,2.4 -95.9,2.4 -95.9,5 -96.4,5
  Bottom Layer region: -1.7,-0.5 -5.3,-0.5 -5.3,-2.4 -4,-2.4 -4,-4.7 -101.4,-4.7 -101.4,-5.9 -1.7,-5.9
  Bottom Layer region: -1.7,0.5 -5.3,0.5 -5.3,2.4 -4,2.4 -4,4.7 -101.7,4.7 -101.7,5.9 -1.7,5.9
  Bottom Layer region: -6.1,-2.6 -7.5,-2.6 -7.5,-4.5 -4.2,-4.5 -4.2,-2.6 -5.6,-2.6 -5.6,0 -6.1,0
  Bottom Layer region: -14,-2.6 -12.6,-2.6 -12.6,-4.5 -15.9,-4.5 -15.9,-2.6 -14.5,-2.6 -14.5,0 -14,0
  Bottom Layer region: -12.4,-2.4 -13.8,-2.4 -13.8,-0.5 -10.5,-0.5 -10.5,-2.4 -11.9,-2.4 -11.9,-5 -12.4,-5
  Bottom Layer region: -105.6,0 -101.1,-4.5 -100.9,-4.5 -100.9,-2.5 -103.4,0
  Bottom Layer region: -39.2,-2.6 -37.8,-2.6 -37.8,-4.5 -41.1,-4.5 -41.1,-2.6 -39.7,-2.6 -39.7,0 -39.2,0
  Bottom Layer region: -22.4,-2.6 -21,-2.6 -21,-4.5 -24.3,-4.5 -24.3,-2.6 -22.9,-2.6 -22.9,0 -22.4,0
  Bottom Layer region: -30.8,-2.6 -29.4,-2.6 -29.4,-4.5 -32.7,-4.5 -32.7,-2.6 -31.3,-2.6 -31.3,0 -30.8,0
  Bottom Layer region: -101.7,-5.9 -107.6,0 -105.9,0 -101.2,-4.7 -101.2,-5.9
  Bottom Layer region: -37.6,-2.4 -39,-2.4 -39,-0.5 -35.7,-0.5 -35.7,-2.4 -37.1,-2.4 -37.1,-5 -37.6,-5
  Bottom Layer region: -29.2,-2.4 -30.6,-2.4 -30.6,-0.5 -27.3,-0.5 -27.3,-2.4 -28.7,-2.4 -28.7,-5 -29.2,-5
  Bottom Layer region: -20.8,-2.4 -22.2,-2.4 -22.2,-0.5 -18.9,-0.5 -18.9,-2.4 -20.3,-2.4 -20.3,-5 -20.8,-5
  Bottom Layer region: -14,2.6 -12.6,2.6 -12.6,4.5 -15.9,4.5 -15.9,2.6 -14.5,2.6 -14.5,0 -14,0
  Bottom Layer region: -5.6,2.6 -4.2,2.6 -4.2,4.5 -7.5,4.5 -7.5,2.6 -6.1,2.6 -6.1,0 -5.6,0
  Bottom Layer region: -12.4,2.4 -13.8,2.4 -13.8,0.5 -10.5,0.5 -10.5,2.4 -11.9,2.4 -11.9,5 -12.4,5
  Bottom Layer region: -30.8,2.6 -29.4,2.6 -29.4,4.5 -32.7,4.5 -32.7,2.6 -31.3,2.6 -31.3,0 -30.8,0
  Bottom Layer region: -39.2,2.6 -37.8,2.6 -37.8,4.5 -41.1,4.5 -41.1,2.6 -39.7,2.6 -39.7,0 -39.2,0
  Bottom Layer region: -105.6,0 -101.1,4.5 -100.9,4.5 -100.9,2.5 -103.4,0
  Bottom Layer region: -22.4,2.6 -21,2.6 -21,4.5 -24.3,4.5 -24.3,2.6 -22.9,2.6 -22.9,0 -22.4,0
  Bottom Layer region: -101.7,5.9 -107.6,0 -105.9,0 -101.2,4.7 -101.2,5.9
  Bottom Layer region: -37.6,2.4 -39,2.4 -39,0.5 -35.7,0.5 -35.7,2.4 -37.1,2.4 -37.1,5 -37.6,5
  Bottom Layer region: -29.2,2.4 -30.6,2.4 -30.6,0.5 -27.3,0.5 -27.3,2.4 -28.7,2.4 -28.7,5 -29.2,5
  Bottom Layer region: -20.8,2.4 -22.2,2.4 -22.2,0.5 -18.9,0.5 -18.9,2.4 -20.3,2.4 -20.3,5 -20.8,5
  Bottom Layer region: -1.7,-5.9 1.1,-5.9 1.1,-4.1 1.1,-2.3 1.1,-1.1 -0.8,-1.1 -1.7,-0.5
  Bottom Layer region: -9.8,-2.6 -8.4,-2.6 -8.4,-4.5 -11.7,-4.5 -11.7,-2.6 -10.3,-2.6 -10.3,0 -9.8,0
  Bottom Layer region: -8.2,-2.4 -9.6,-2.4 -9.6,-0.5 -6.3,-0.5 -6.3,-2.4 -7.7,-2.4 -7.7,-5 -8.2,-5
  Bottom Layer region: -18.2,-2.6 -16.8,-2.6 -16.8,-4.5 -20.1,-4.5 -20.1,-2.6 -18.7,-2.6 -18.7,0 -18.2,0
  Bottom Layer region: -16.6,-2.4 -18,-2.4 -18,-0.5 -14.7,-0.5 -14.7,-2.4 -16.1,-2.4 -16.1,-5 -16.6,-5
  Bottom Layer region: -26.6,-2.6 -25.2,-2.6 -25.2,-4.5 -28.5,-4.5 -28.5,-2.6 -27.1,-2.6 -27.1,0 -26.6,0
  Bottom Layer region: -25,-2.4 -26.4,-2.4 -26.4,-0.5 -23.1,-0.5 -23.1,-2.4 -24.5,-2.4 -24.5,-5 -25,-5
  Bottom Layer region: -35,-2.6 -33.6,-2.6 -33.6,-4.5 -36.9,-4.5 -36.9,-2.6 -35.5,-2.6 -35.5,0 -35,0
  Bottom Layer region: -33.4,-2.4 -34.8,-2.4 -34.8,-0.5 -31.5,-0.5 -31.5,-2.4 -32.9,-2.4 -32.9,-5 -33.4,-5
  Bottom Layer region: -100.65,-4.9 -100.65,-2.4 -102.55,-0.5 -98.7,-0.5 -98.7,-2.4 -100.05,-2.4 -100.05,-4.9
  Bottom Layer region: -0.7,-0.9 1.1,-0.9 1.1,0.9 -0.7,0.9
  Bottom Layer region: -1.7,0.5 -0.8,1.1 1.1,1.1 1.1,2.3 1.1,4.1 1.1,5.9 -1.7,5.9
  Bottom Layer region: -9.8,2.6 -8.4,2.6 -8.4,4.5 -11.7,4.5 -11.7,2.6 -10.3,2.6 -10.3,0 -9.8,0
  Bottom Layer region: -8.2,2.4 -9.6,2.4 -9.6,0.5 -6.3,0.5 -6.3,2.4 -7.7,2.4 -7.7,5 -8.2,5
  Bottom Layer region: -18.2,2.6 -16.8,2.6 -16.8,4.5 -20.1,4.5 -20.1,2.6 -18.7,2.6 -18.7,0 -18.2,0
  Bottom Layer region: -16.6,2.4 -18,2.4 -18,0.5 -14.7,0.5 -14.7,2.4 -16.1,2.4 -16.1,5 -16.6,5
  Bottom Layer region: -26.6,2.6 -25.2,2.6 -25.2,4.5 -28.5,4.5 -28.5,2.6 -27.1,2.6 -27.1,0 -26.6,0
  Bottom Layer region: -25,2.4 -26.4,2.4 -26.4,0.5 -23.1,0.5 -23.1,2.4 -24.5,2.4 -24.5,5 -25,5
  Bottom Layer region: -35,2.6 -33.6,2.6 -33.6,4.5 -36.9,4.5 -36.9,2.6 -35.5,2.6 -35.5,0 -35,0
  Bottom Layer region: -33.4,2.4 -34.8,2.4 -34.8,0.5 -31.5,0.5 -31.5,2.4 -32.9,2.4 -32.9,5 -33.4,5
  Bottom Layer region: -100.7,4.9 -100.7,2.4 -102.6,0.5 -98.7,0.5 -98.7,2.4 -100.1,2.4 -100.1,4.9
  Bottom Layer region: -1.7,0.3 -0.7,0.9 -0.7,-0.9 -1.7,-0.3
  Bottom Layer region: 0,2
  Bottom Layer region: -1.7,5.9
  Bottom Layer region: -1.7,5.9
  Bottom Layer region: -0.7,1.3
  Bottom Layer region: -1.7,0.2
  Bottom Layer region: -42.9,5.9
  Bottom Layer region: -42.1,4.5
  Bottom Layer region: -42,4.5
  Bottom Layer region: -42.9,-5.9
  Bottom Layer region: -46.9,0
  Bottom Layer region: -46.9,0
  Bottom Layer region: 0,2
  Bottom Layer region: -1.7,5.9
  Bottom Layer region: -1.7,5.9
  Bottom Layer region: -1.7,0.2
  Bottom Layer region: -0.7,1.3
  Bottom Layer region: -42.9,5.9
  Bottom Layer region: -42,4.5
  Bottom Layer region: -42.1,4.5
  Bottom Layer region: -42.9,-5.9
  Bottom Layer region: -46.9,0
  Bottom Layer region: -46.9,0
  Bottom Layer region: -47.6,-2.6 -46.2,-2.6 -46.2,-4.5 -49.5,-4.5 -49.5,-2.6 -48.1,-2.6 -48.1,0 -47.6,0
  Bottom Layer region: -46,-2.4 -47.4,-2.4 -47.4,-0.5 -44.1,-0.5 -44.1,-2.4 -45.5,-2.4 -45.5,-5 -46,-5
  Bottom Layer region: -72.8,-2.6 -71.4,-2.6 -71.4,-4.5 -74.7,-4.5 -74.7,-2.6 -73.3,-2.6 -73.3,0 -72.8,0
  Bottom Layer region: -56,-2.6 -54.6,-2.6 -54.6,-4.5 -57.9,-4.5 -57.9,-2.6 -56.5,-2.6 -56.5,0 -56,0
  Bottom Layer region: -64.4,-2.6 -63,-2.6 -63,-4.5 -66.3,-4.5 -66.3,-2.6 -64.9,-2.6 -64.9,0 -64.4,0
  Bottom Layer region: -71.2,-2.4 -72.6,-2.4 -72.6,-0.5 -69.3,-0.5 -69.3,-2.4 -70.7,-2.4 -70.7,-5 -71.2,-5
  Bottom Layer region: -62.8,-2.4 -64.2,-2.4 -64.2,-0.5 -60.9,-0.5 -60.9,-2.4 -62.3,-2.4 -62.3,-5 -62.8,-5
  Bottom Layer region: -54.4,-2.4 -55.8,-2.4 -55.8,-0.5 -52.5,-0.5 -52.5,-2.4 -53.9,-2.4 -53.9,-5 -54.4,-5
  Bottom Layer region: -43.4,-2.6 -42,-2.6 -42,-4.5 -45.3,-4.5 -45.3,-2.6 -43.9,-2.6 -43.9,0 -43.4,0
  Bottom Layer region: -41.8,-2.4 -43.2,-2.4 -43.2,-0.5 -39.9,-0.5 -39.9,-2.4 -41.3,-2.4 -41.3,-5 -41.8,-5
  Bottom Layer region: -51.8,-2.6 -50.4,-2.6 -50.4,-4.5 -53.7,-4.5 -53.7,-2.6 -52.3,-2.6 -52.3,0 -51.8,0
  Bottom Layer region: -50.2,-2.4 -51.6,-2.4 -51.6,-0.5 -48.3,-0.5 -48.3,-2.4 -49.7,-2.4 -49.7,-5 -50.2,-5
  Bottom Layer region: -60.2,-2.6 -58.8,-2.6 -58.8,-4.5 -62.1,-4.5 -62.1,-2.6 -60.7,-2.6 -60.7,0 -60.2,0
  Bottom Layer region: -58.6,-2.4 -60,-2.4 -60,-0.5 -56.7,-0.5 -56.7,-2.4 -58.1,-2.4 -58.1,-5 -58.6,-5
  Bottom Layer region: -68.6,-2.6 -67.2,-2.6 -67.2,-4.5 -70.5,-4.5 -70.5,-2.6 -69.1,-2.6 -69.1,0 -68.6,0
  Bottom Layer region: -67,-2.4 -68.4,-2.4 -68.4,-0.5 -65.1,-0.5 -65.1,-2.4 -66.5,-2.4 -66.5,-5 -67,-5
  Bottom Layer region: -81.2,-2.6 -79.8,-2.6 -79.8,-4.5 -83.1,-4.5 -83.1,-2.6 -81.7,-2.6 -81.7,0 -81.2,0
  Bottom Layer region: -79.6,-2.4 -81,-2.4 -81,-0.5 -77.7,-0.5 -77.7,-2.4 -79.1,-2.4 -79.1,-5 -79.6,-5
  Bottom Layer region: -89.6,-2.6 -88.2,-2.6 -88.2,-4.5 -91.5,-4.5 -91.5,-2.6 -90.1,-2.6 -90.1,0 -89.6,0
  Bottom Layer region: -98,-2.6 -96.6,-2.6 -96.6,-4.5 -99.9,-4.5 -99.9,-2.6 -98.5,-2.6 -98.5,0 -98,0
  Bottom Layer region: -96.4,-2.4 -97.8,-2.4 -97.8,-0.5 -94.5,-0.5 -94.5,-2.4 -95.9,-2.4 -95.9,-5 -96.4,-5
  Bottom Layer region: -88,-2.4 -89.4,-2.4 -89.4,-0.5 -86.1,-0.5 -86.1,-2.4 -87.5,-2.4 -87.5,-5 -88,-5
  Bottom Layer region: -77,-2.6 -75.6,-2.6 -75.6,-4.5 -78.9,-4.5 -78.9,-2.6 -77.5,-2.6 -77.5,0 -77,0
  Bottom Layer region: -75.4,-2.4 -76.8,-2.4 -76.8,-0.5 -73.5,-0.5 -73.5,-2.4 -74.9,-2.4 -74.9,-5 -75.4,-5
  Bottom Layer region: -85.4,-2.6 -84,-2.6 -84,-4.5 -87.3,-4.5 -87.3,-2.6 -85.9,-2.6 -85.9,0 -85.4,0
  Bottom Layer region: -83.8,-2.4 -85.2,-2.4 -85.2,-0.5 -81.9,-0.5 -81.9,-2.4 -83.3,-2.4 -83.3,-5 -83.8,-5
  Bottom Layer region: -93.8,-2.6 -92.4,-2.6 -92.4,-4.5 -95.7,-4.5 -95.7,-2.6 -94.3,-2.6 -94.3,0 -93.8,0
  Bottom Layer region: -92.2,-2.4 -93.6,-2.4 -93.6,-0.5 -90.3,-0.5 -90.3,-2.4 -91.7,-2.4 -91.7,-5 -92.2,-5
  Bottom Layer region: -47.6,2.6 -46.2,2.6 -46.2,4.5 -49.5,4.5 -49.5,2.6 -48.1,2.6 -48.1,0 -47.6,0
  Bottom Layer region: -46,2.4 -47.4,2.4 -47.4,0.5 -44.1,0.5 -44.1,2.4 -45.5,2.4 -45.5,5 -46,5
  Bottom Layer region: -64.4,2.6 -63,2.6 -63,4.5 -66.3,4.5 -66.3,2.6 -64.9,2.6 -64.9,0 -64.4,0
  Bottom Layer region: -72.8,2.6 -71.4,2.6 -71.4,4.5 -74.7,4.5 -74.7,2.6 -73.3,2.6 -73.3,0 -72.8,0
  Bottom Layer region: -56,2.6 -54.6,2.6 -54.6,4.5 -57.9,4.5 -57.9,2.6 -56.5,2.6 -56.5,0 -56,0
  Bottom Layer region: -71.2,2.4 -72.6,2.4 -72.6,0.5 -69.3,0.5 -69.3,2.4 -70.7,2.4 -70.7,5 -71.2,5
  Bottom Layer region: -62.8,2.4 -64.2,2.4 -64.2,0.5 -60.9,0.5 -60.9,2.4 -62.3,2.4 -62.3,5 -62.8,5
  Bottom Layer region: -54.4,2.4 -55.8,2.4 -55.8,0.5 -52.5,0.5 -52.5,2.4 -53.9,2.4 -53.9,5 -54.4,5
  Bottom Layer region: -43.4,2.6 -42,2.6 -42,4.5 -45.3,4.5 -45.3,2.6 -43.9,2.6 -43.9,0 -43.4,0
  Bottom Layer region: -41.8,2.4 -43.2,2.4 -43.2,0.5 -39.9,0.5 -39.9,2.4 -41.3,2.4 -41.3,5 -41.8,5
  Bottom Layer region: -51.8,2.6 -50.4,2.6 -50.4,4.5 -53.7,4.5 -53.7,2.6 -52.3,2.6 -52.3,0 -51.8,0
  Bottom Layer region: -50.2,2.4 -51.6,2.4 -51.6,0.5 -48.3,0.5 -48.3,2.4 -49.7,2.4 -49.7,5 -50.2,5
  Bottom Layer region: -60.2,2.6 -58.8,2.6 -58.8,4.5 -62.1,4.5 -62.1,2.6 -60.7,2.6 -60.7,0 -60.2,0
  Bottom Layer region: -58.6,2.4 -60,2.4 -60,0.5 -56.7,0.5 -56.7,2.4 -58.1,2.4 -58.1,5 -58.6,5
  Bottom Layer region: -68.6,2.6 -67.2,2.6 -67.2,4.5 -70.5,4.5 -70.5,2.6 -69.1,2.6 -69.1,0 -68.6,0
  Bottom Layer region: -67,2.4 -68.4,2.4 -68.4,0.5 -65.1,0.5 -65.1,2.4 -66.5,2.4 -66.5,5 -67,5
  Bottom Layer region: -81.2,2.6 -79.8,2.6 -79.8,4.5 -83.1,4.5 -83.1,2.6 -81.7,2.6 -81.7,0 -81.2,0
  Bottom Layer region: -79.6,2.4 -81,2.4 -81,0.5 -77.7,0.5 -77.7,2.4 -79.1,2.4 -79.1,5 -79.6,5
  Bottom Layer region: -89.6,2.6 -88.2,2.6 -88.2,4.5 -91.5,4.5 -91.5,2.6 -90.1,2.6 -90.1,0 -89.6,0
  Bottom Layer region: -88,2.4 -89.4,2.4 -89.4,0.5 -86.1,0.5 -86.1,2.4 -87.5,2.4 -87.5,5 -88,5
  Bottom Layer region: -77,2.6 -75.6,2.6 -75.6,4.5 -78.9,4.5 -78.9,2.6 -77.5,2.6 -77.5,0 -77,0
  Bottom Layer region: -75.4,2.4 -76.8,2.4 -76.8,0.5 -73.5,0.5 -73.5,2.4 -74.9,2.4 -74.9,5 -75.4,5
  Bottom Layer region: -85.4,2.6 -84,2.6 -84,4.5 -87.3,4.5 -87.3,2.6 -85.9,2.6 -85.9,0 -85.4,0
  Bottom Layer region: -83.8,2.4 -85.2,2.4 -85.2,0.5 -81.9,0.5 -81.9,2.4 -83.3,2.4 -83.3,5 -83.8,5
  Bottom Layer region: -93.8,2.6 -92.4,2.6 -92.4,4.5 -95.7,4.5 -95.7,2.6 -94.3,2.6 -94.3,0 -93.8,0
  Bottom Layer region: -92.2,2.4 -93.6,2.4 -93.6,0.5 -90.3,0.5 -90.3,2.4 -91.7,2.4 -91.7,5 -92.2,5
"Solar Panel connenctor" [mm]
  rrect50% 2.5x1.5 smd: PV+(0.03,1.107) PV-(0,-1.1)
  silkscreen extent -1.79,-2.3 1.81,2.2
SOT23-3P95_240X114L20X40N [mm] "Small Outline Transistor (SOT23), 0.95 mm pitch; 3 pin, 2.90 mm L X 1.30 mm W X 1.14 mm H body"
  rrect52% 0.78x0.58 smd: 1(-1.075,0) 2(1.075,0.95) 3(1.075,-0.95)
  silkscreen extent -0.7,-1.5 0.7,1.5, body extent -1.2,-1.45 1.2,1.45, height 1.14
SOT23-5 [mm] "SOT23, 5-Leads, Body 3.05x1.75mm, Pitch 0.95mm, IPC Low Density"
  rrect15% 1.2x0.65 smd: 1(1.475,-0.95) 2(1.475,0) 3(1.475,0.95) 4(-1.475,0.95) 5(-1.475,-0.95)
  silkscreen extent -0.5,-1.95 1.6,1.55, body extent -1.42,-1.46 1.42,1.46, height 1.08
SOT229P700X180-4N [mm]
  rrect15% 1.31x0.93 smd: 1(3.145,-2.29) 2(3.145,0) 3(3.145,2.29)
  rrect15% 1.31x3.24 smd: 4(-3.545,0)
  silkscreen extent -2.06,-3.36 4.6,3.36, body extent -3.7,-3.25 3.3,3.25, height 1.85
SPV1040 [mm]
  rect 1.65x0.3 smd: 1(-2.775,0.975) 2(-2.775,0.325) 3(-2.775,-0.325) 4(-2.775,-0.975) 5(2.775,-0.975) 6(2.775,-0.325) 7(2.775,0.325) 8(2.775,0.975)
  silkscreen extent -2.9,-1.55 1.55,1.8, body extent -3.2,-1.5 3.2,1.5, height 1.2